# Altium PCB 载板V2.PcbDoc (part 1 of 2)
Units mil, origin at the board's own origin, x right, y up, seen from the top; angles counter-clockwise.
Board outline 2583.5 x 2223.97 mil, 4 copper layers (Top Layer, Mid-Layer 1, Mid-Layer 2, Bottom Layer); 78 components, 78 nets, 323 pads, 130 vias.
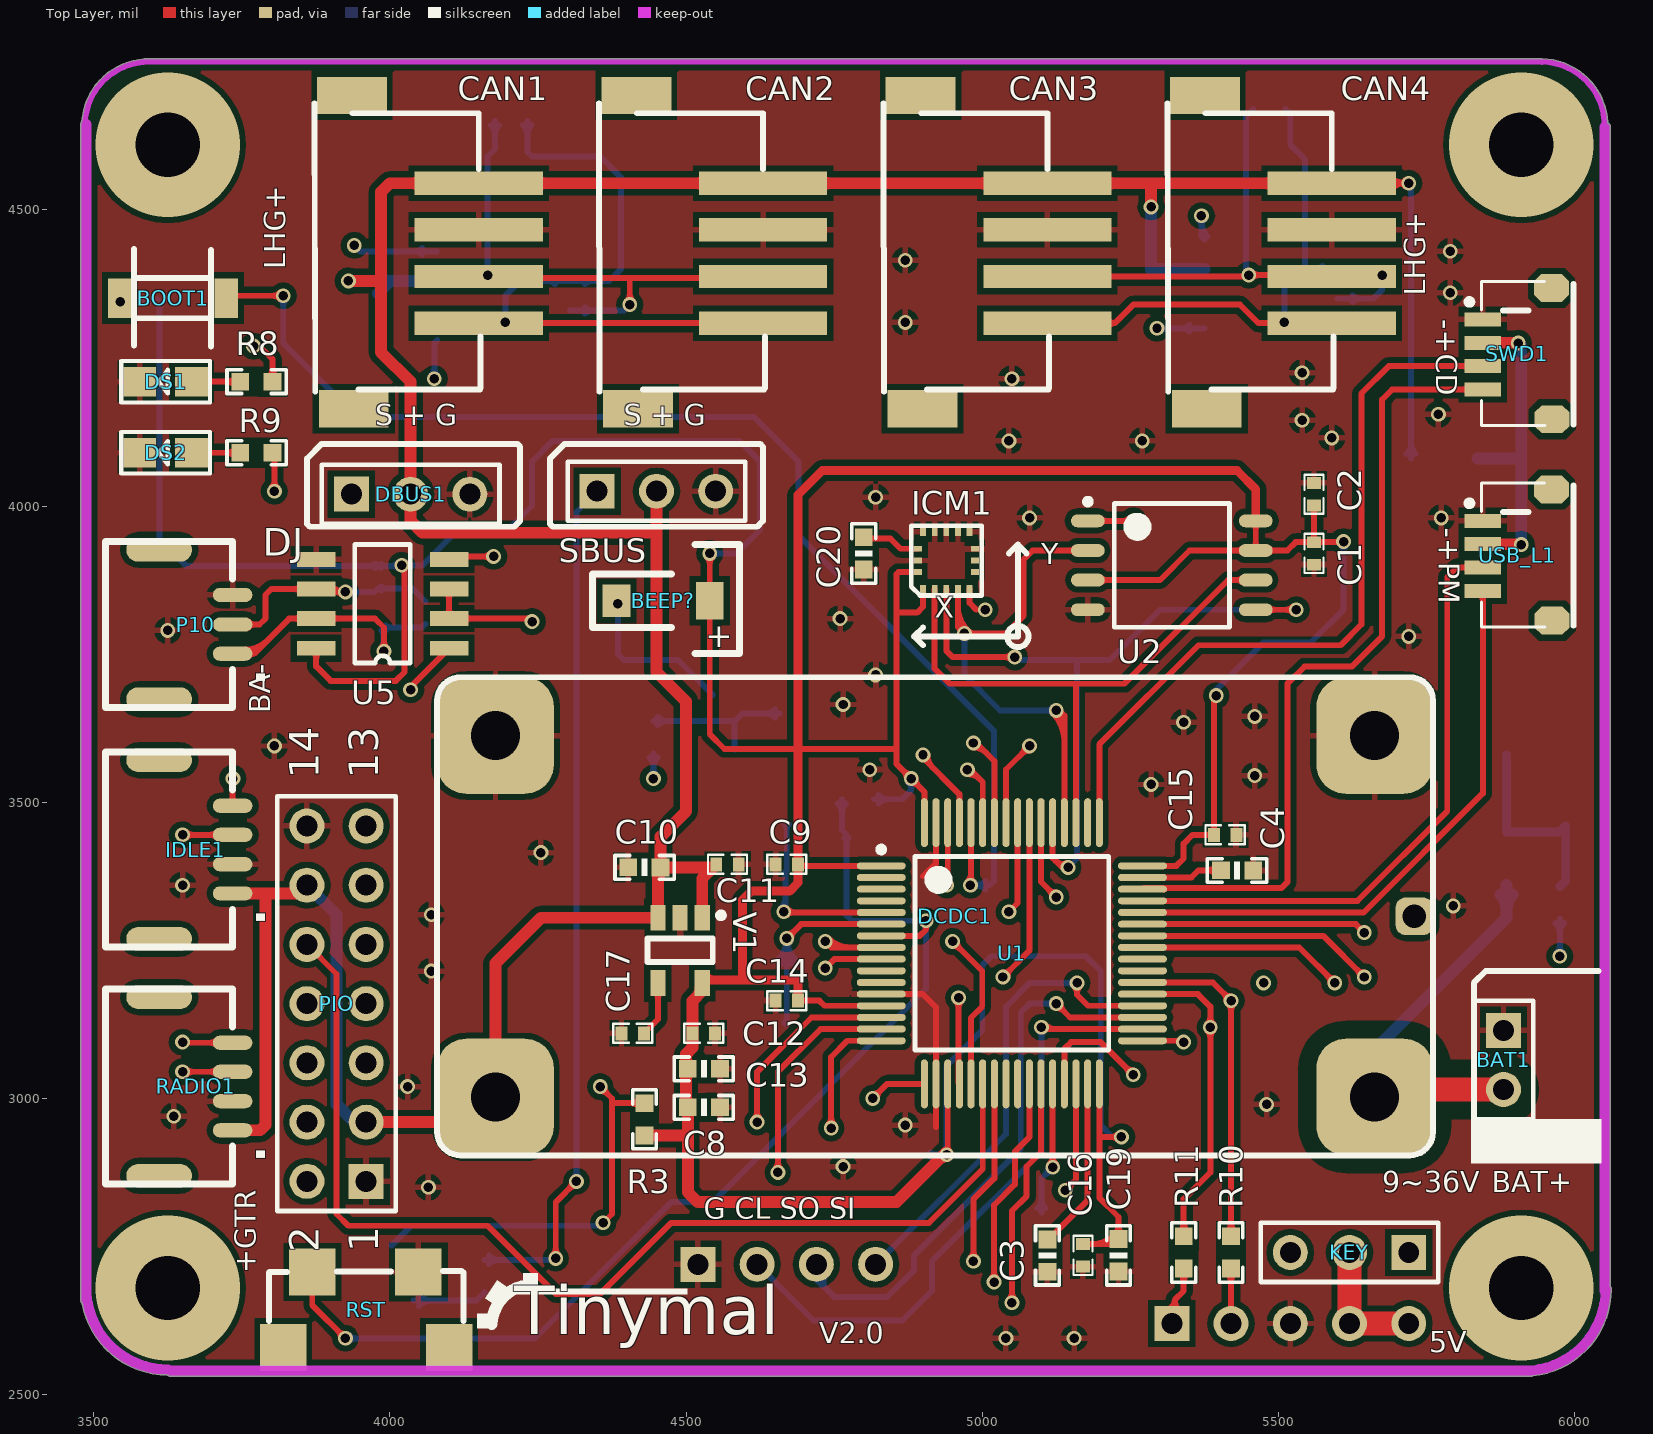
[diagram p0: Top Layer view]
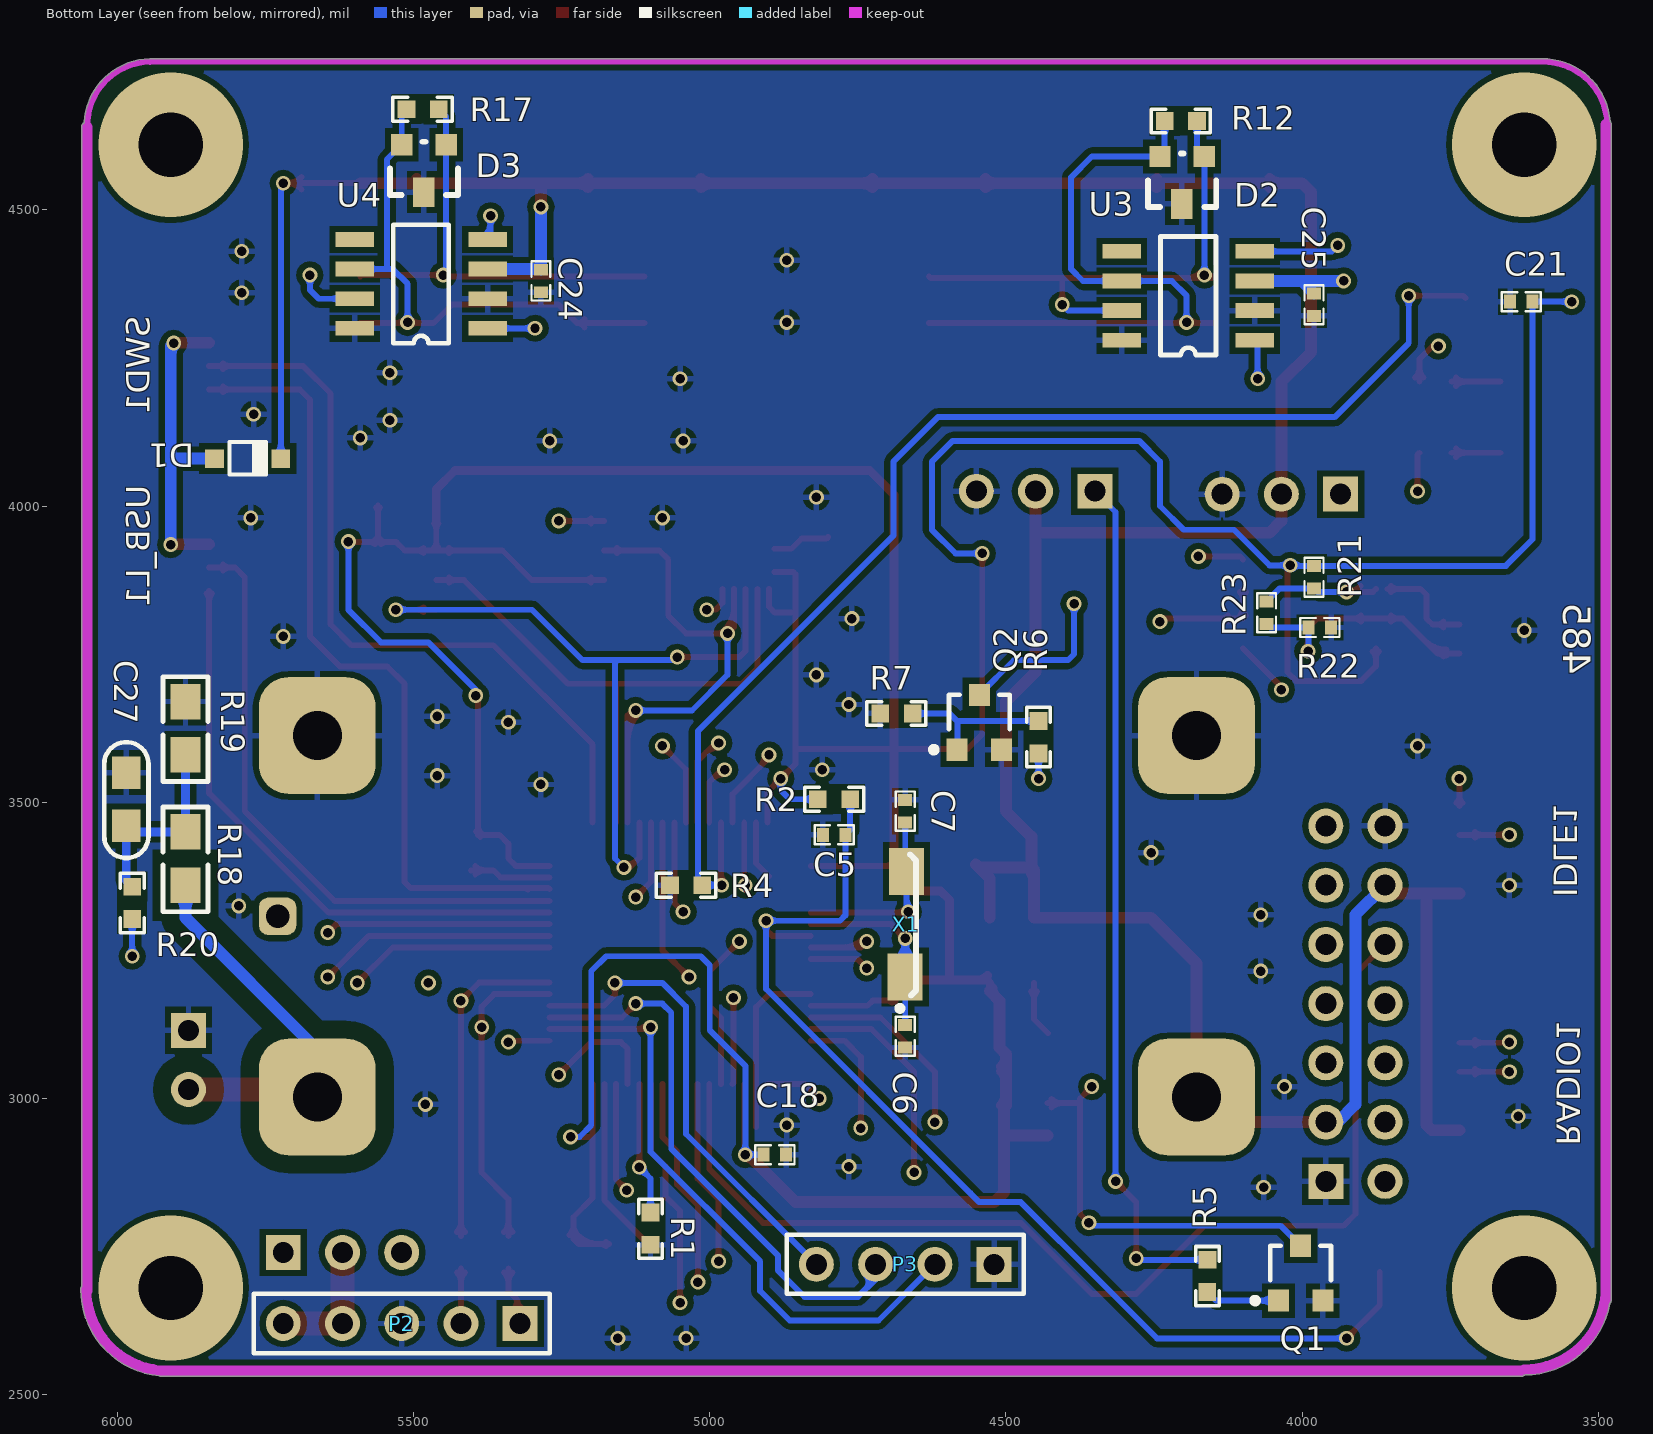
[diagram p1: Bottom Layer view, seen from below]
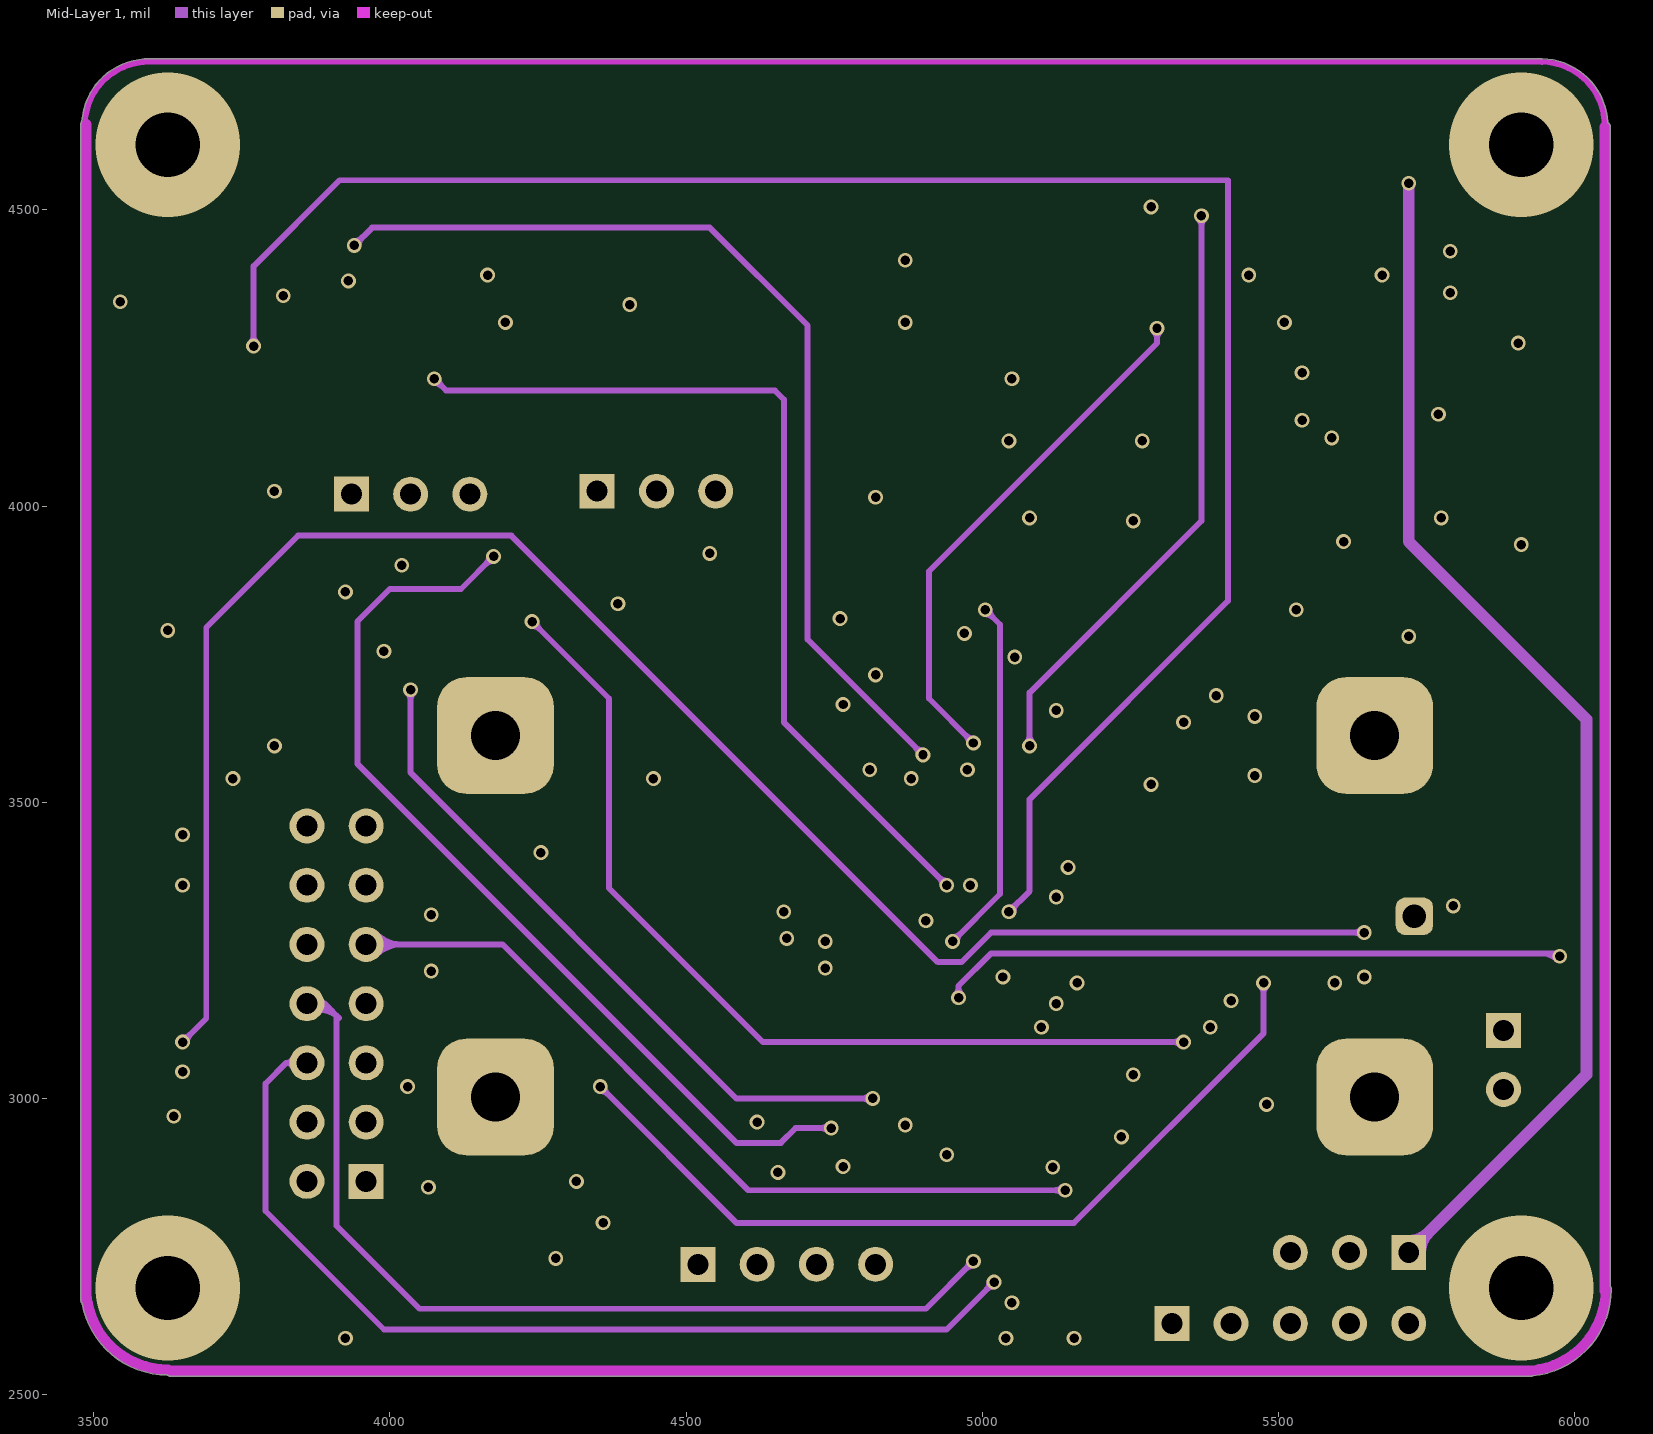
[diagram p2: Mid-Layer 1]
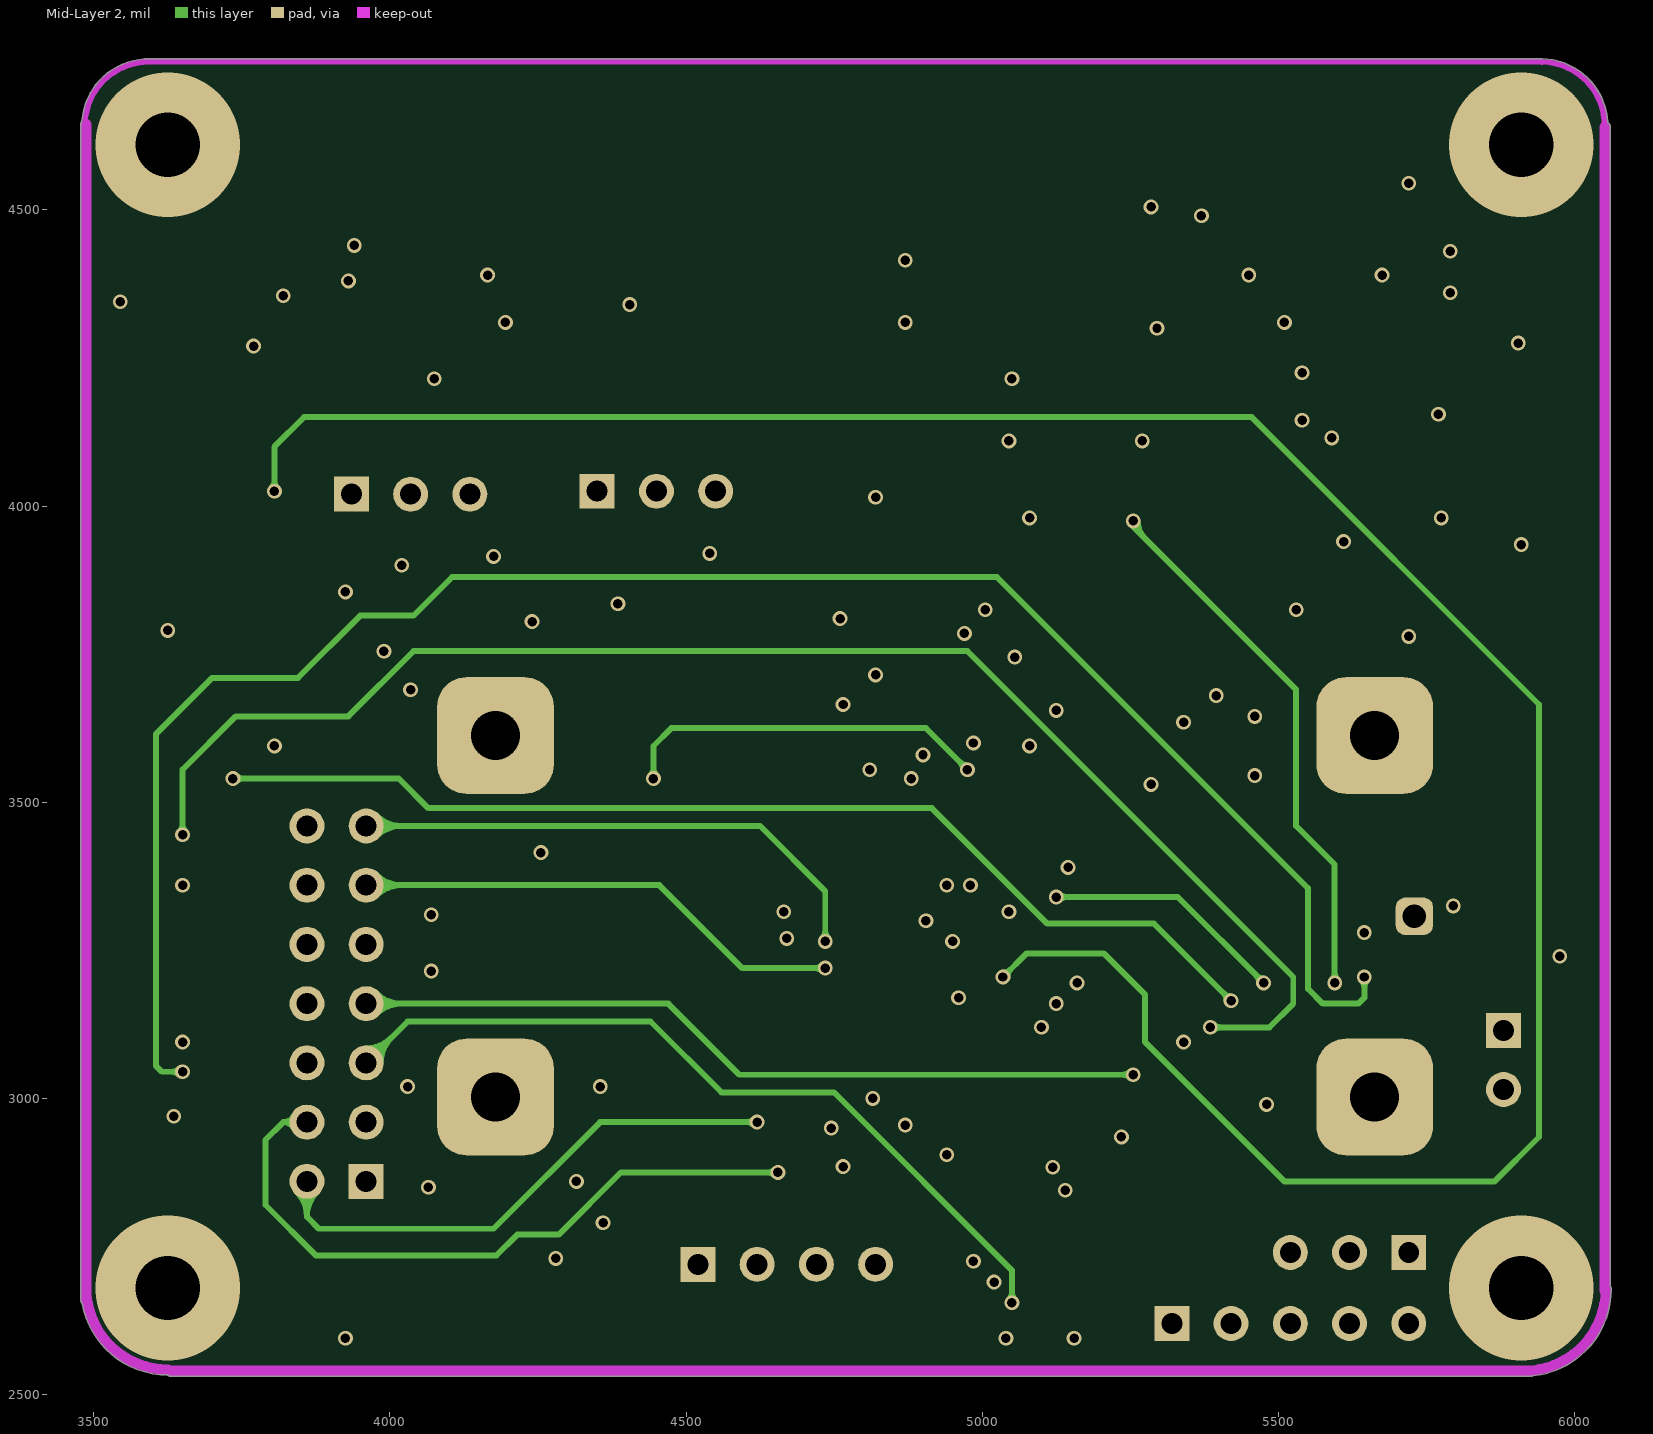
[diagram p3: Mid-Layer 2]
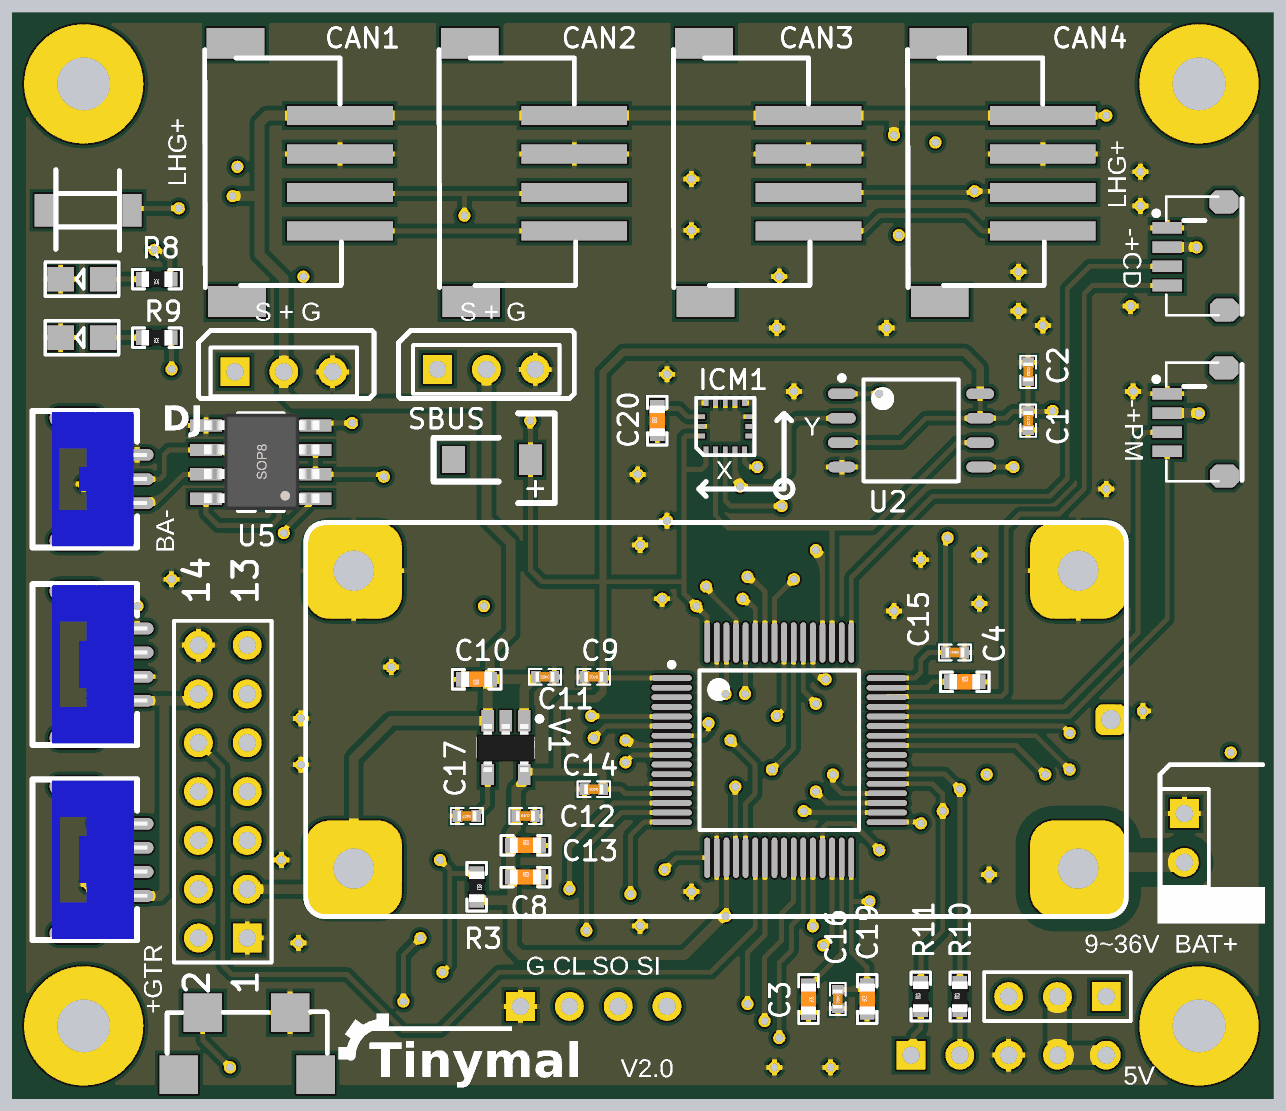
[diagram p5: 3D render of the assembled board from above, using the file's embedded part models]
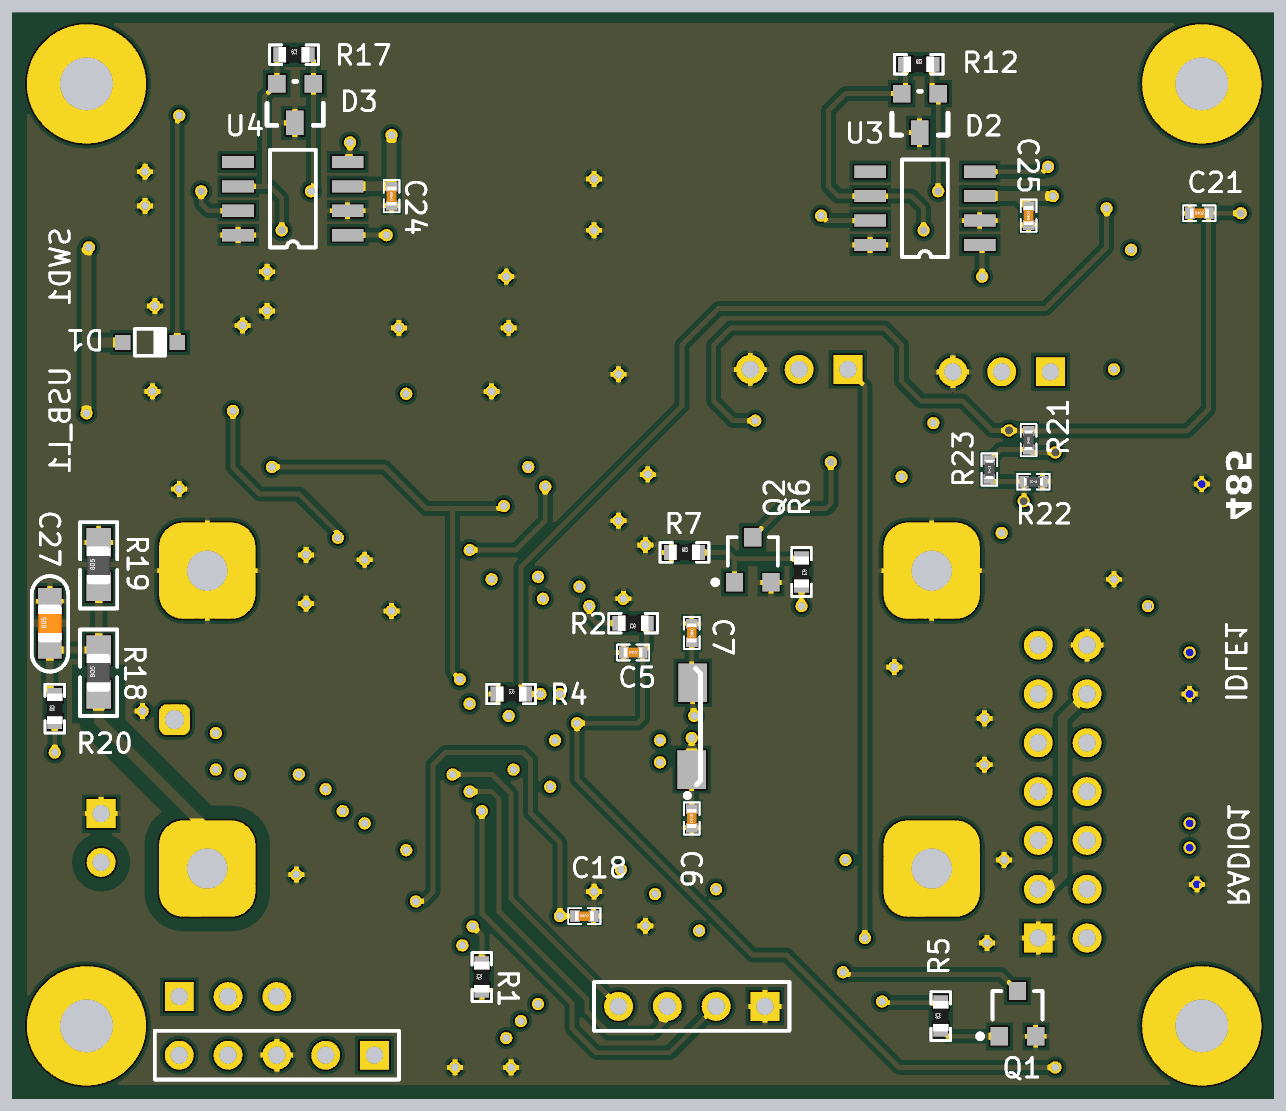
[diagram p6: 3D render of the assembled board from below, using the file's embedded part models]

## Layer stack, top to bottom
Top Layer: signal copper 1.4
Dielectric: dielectric 12.6, FR-4, Dk 4.8
Mid-Layer 1: signal copper 1.4
Dielectric: dielectric 12.6, FR-4, Dk 4.8
Mid-Layer 2: signal copper 1.4
Dielectric: dielectric 12.6, FR-4, Dk 4.8
Bottom Layer: signal copper 1.4

## Board outline
3478.25,2660 3478.25,4644.04 cw(c3487.2,4644.04) 3480.14,4649.54 cw(c3592.94,4641.98) 3595.05,4755.02 cw(c3592.94,4641.98) 3595.1,4755.01 3595.05,4755.02 5944.13,4754.94 cw(c5945,4750) 5945.1,4755.01 cw(c5942.94,4641.98) 6055.86,4647.61 cw(c6051.26,4639.92) 6060.21,4639.92 6060.21,2682.81 cw(c6052.8,2677.8) 6061.75,2677.8 cw(c5915,2677.8) 5929.5,2531.77 cw(c5925.98,2540) 5925.98,2531.05 3630,2531.05 cw(c3630,2540) 3624.11,2533.26 cw(c3625,2680) 3480.58,2653.98 cw(c3487.2,2660)

## Design rules (kind name [scope] priority, off if disabled: settings)
Clearance Clearance_3 [(InPolygon) vs InNet('VCC_DJ')] p1: gap=30
Clearance Clearance_2 [(InPolygon) vs InNet('POWER')] p2: gap=30
Clearance Clearance_1 [(InPolygon)] p3: gap=10
Clearance [All] p4: gap=6
PolygonConnect [All] p1: connectstyle=Relief reliefconductorwidth=10 reliefentries=4 polygonreliefangle="90 Angle"
RoutingVias [All] p1: holewidth=28 width=50 viastyle="Through Hole" minholewidth=16 minwidth=25 maxholewidth=28 maxwidth=50
SilkscreenOverComponentPads [All] p1: minsilkscreentomaskgap=10
SolderMaskExpansion [All] p1: expansion=4
Width [All] p1: maxlimit=66 minlimit=10 preferedwidth=10 minimp=50.000000 maximp=50.000000 favimp=50.000000
27 further rules are at their usual default settings.

## Components (designator, comment, footprint, x,y, rotation, side; value= is the part's Value field where it differs from the comment)
BAT1 "Header 2" HDR1X2 5880,3115 r270 top
BEEP? "BEEP" DET402 4540,3840 r180 top
BOOT1 "Header 2" 663*4*2.0/2.5mm 3670,4335 r180 top
C1 "0.1UF" "C 0402" 5560,3920 r270 top
C2 "1UF" "C 0402" 5560,4020 r270 top
C3 "2.2UF" C0603 5110,2735 r270 top
C4 "2.2UF" C0603 5430,3385 r0 top
C5 "10NF" "C 0402" 4790,3445 r180 bottom
C6 "20PF" "C 0402" 4670,3105 r90 bottom
C7 "20PF" "C 0402" 4670,3485 r270 bottom
C8 "0.1UF" C0603 4530,2985 r0 top
C9 "0.1UF" "C 0402" 4670,3395.1 r180 top
C10 "10uF" C0603 4430,3390 r180 top
C11 "0.1uF" "C 0402" 4570,3395.1 r180 top
C12 "0.1uF" "C 0402" 4530,3110 r0 top
C13 "10uF" C0603 4530,3050 r0 top
C14 "0.1UF" "C 0402" 4670,3165 r180 top
C15 "0.1UF" "C 0402" 5410,3445 r0 top
C16 "0.1UF" "C 0402" 5170,2735 r270 top
C17 "0.1uF" "C 0402" 4410,3110 r180 top
C18 "0.1UF" "C 0402" 4890,2905 r180 bottom
C19 "0.1UF" C0603 5230,2735 r90 top
C20 "0.1UF" C0603 4800,3920 r90 top
C21 "0.1UF" "C 0402" 3630,4345 r180 bottom
C24 "0.1UF" "C 0402" 5285,4380 r90 bottom
C25 "0.1UF" "C 0402" 3980,4340 r90 bottom
C27 "100uF" C0805 5985,3505 r90 bottom
CAN1 "Header 4" PH2.0-4SMT 4150,4545 r270 top
CAN2 "Header 4" PH2.0-4SMT 4630,4545 r270 top
CAN3 "Header 4" PH2.0-4SMT 5110,4545 r270 top
CAN4 "Header 4" PH2.0-4SMT 5590,4545 r270 top
D1 "BAT54WS" SOD-323 5780,4080 r0 bottom
D2 "PESD1CAN" SOT-23 4165,4590 r0 bottom
D3 "PESD1CAN" SOT-23 5445,4610 r0 bottom
DBUS1 "Header 3" HDR1X3 3935,4020 r0 top
DCDC1 "Header 2X2" DCDC5V 5660,3000 r180 top
DS1 "LED1" SMDLED 3665.03,4209.94 r180 top
DS2 "LED1" SMDLED 3665.03,4089.94 r180 top
ICM1 "ICM20602" ICM20602 4900,3860 r90 top
IDLE1 "Header 4" JST_GH_V4 3520,3420 r90 top
KEY "MSK-12D19" HDR1X3 5720,2740 r180 top
P2 "Header 5" HDR1X5 5320,2620 r0 bottom
P3 "Header 4" HDR1X4 4520,2720 r0 bottom
P10 "Header 3" JST_GH_V3 3520,3800 r90 top
PIO "Header 7X2" HDR2X7 3960,2860 r90 top
Q1 "S8050" SOT-23R 4002.5,2700 r180 bottom
Q2 "S8050" SOT-23R 4545,3630 r180 bottom
R1 "10K" R0603 5100,2780 r90 bottom
R2 "10K" R0603 4790,3505 r0 bottom
R3 "10K" R0603 4430,2965 r270 top
R4 "10K" R0603 5040,3360 r180 bottom
R5 "560R" R0603 4160,2700 r90 bottom
R6 "1K" R0603 4445.06,3610 r270 bottom
R7 "10K" R0603 4685,3650 r180 bottom
R8 "100R" R0603 3775.03,4209.94 r180 top
R9 "100R" R0603 3775.03,4089.94 r180 top
R10 "10K" R0603 5420,2740 r90 top
R11 "10K" R0603 5340,2740 r90 top
R12 "120R" R0603 4205,4650 r180 bottom
R17 "120R" R0603 5485,4670 r180 bottom
R18 "100K" R0805 5885,3405 r90 bottom
R19 "10K" R0805 5885,3625 r90 bottom
R20 "560R" R0603 5975,3330 r90 bottom
R21 "360R" "R 0402" 3980,3880 r90 bottom
R22 "360R" "R 0402" 3970,3795 r0 bottom
R23 "120R" "R 0402" 4060,3820 r90 bottom
RADIO1 "Header 4" JST_GH_V4 3520,3020 r90 top
RST "Header 2" KEY_SAD 3820,2580 r0 top
SBUS "Header 3" HDR1X3 4350,4025 r0 top
SWD1 "Header 4" "SH1.0-4P - UP" 5845,4315 r270 top
U1 "STM32F405RGT6" LQFP64_M 5050,3245 r0 top locked
U2 "W25X16" W25Q32FVZPIG 5320,3900 r0 top
U3 "TJA1050" SOP-8 4080,4280 r0 bottom
U4 "TJA1050" SOP-8 5375,4300 r0 bottom
U5 "SP3485" SOP-8 4100,3760 r180 top
USB_L1 "Header 4" "SH1.0-4P - UP" 5845,3975 r270 top
V1 "RT9193-3.3/LP2985/SPX3819" SOT23-5 4490,3250 r90 top
X1 "8MHZ" PXCL 4670,3205 r180 bottom

## Footprints (in the part's own frame and the unit in brackets; to place one, negate y for a bottom-side part, rotate by r counter-clockwise, add the part's x,y. Pads: shape width x height; smd on the part's side, far side on the other; paste and mask are expansions set on the pad)
663*4*2.0/2.5mm [mil] "小龟按键"
  rect 39.37x66.93 smd: 1(126,-16) 2(-54,-16)
  silkscreen extent -28,-99 102,66
C0603 [mil]
  rect 30x30 smd: 1(-27,0) 2(27.5,-0.06)
  silkscreen extent -50,-20 50,20, body extent -31,-16 31,16, height 12
C0805 [mil]
  rect 55x48 smd: 1(-45,0) 2(45,0)
  silkscreen extent -99,-38 97,37, body extent -40,-25 39,25, height 31
"C 0402" [mil]
  rect 20x23.62 smd: 1(-19,0) 2(19,0)
  silkscreen extent -33,-16 33,16, body extent -20,-10 20,10, height 20
DCDC5V [mm]
  rrect50% 5x5 hole 2.1: 1(-0.065,-0.059) 2(37.635,-0.059) 3(-0.065,-15.559) 4(37.635,-15.559)
  rrect50% 1.6x1.6 hole 1: 2(-1.765,-7.809)
  silkscreen extent -2.57,-18.06 40.13,2.44
DET402 [mm]
  rect 1.2x1.6 smd: 1(0,-0.002)
  rect 1.2x1.4 smd: 2(4,0)
  silkscreen extent -1.27,-2.41 5.03,2.26
HDR1X2 [mm] "Connector; Header; 2 Position"
  rect 1.5x1.5 hole 0.9: 1(0,0)
  round 1.5 hole 0.9: 2(2.54,0)
  silkscreen extent -1.27,-1.27 3.81,1.27
HDR1X3 [mm] "Connector; Header; 3 Position"
  rect 1.5x1.5 hole 0.9: 1(0,0)
  round 1.5 hole 0.9: 2(2.54,0) 3(5.08,0)
  silkscreen extent -1.27,-1.27 6.35,1.27
HDR1X4 [mm] "Connector; Header; 4 Position"
  rect 1.5x1.5 hole 0.9: 1(0,0)
  round 1.5 hole 0.9: 2(2.54,0) 3(5.08,0) 4(7.62,0)
  silkscreen extent -1.27,-1.27 8.89,1.27
HDR1X5 [mm] "Connector; Header; 5 Position"
  rect 1.5x1.5 hole 0.9: 1(0,0)
  round 1.5 hole 0.9: 2(2.54,0) 3(5.08,0) 4(7.62,0) 5(10.16,0)
  silkscreen extent -1.27,-1.27 11.43,1.27
HDR2X7 [mm] "Connector; Header; 7x2 Position"
  rect 1.5x1.5 hole 0.9: 1(0,0)
  round 1.5 hole 0.9: 2(0,2.54) 3(2.54,0) 4(2.54,2.54) 5(5.08,0) 6(5.08,2.54) 7(7.62,0) 8(7.62,2.54) 9(10.16,0) 10(10.16,2.54) 11(12.7,0) 12(12.7,2.54) 13(15.24,0) 14(15.24,2.54)
  silkscreen extent -1.27,-1.27 16.51,3.81
ICM20602 [mm]
  rect 0.35x0.25 smd: 1(0,0) 2(0,-0.5) 3(0,-1) 4(0,-1.5) 5(0,-2) 9(2.45,-2) 10(2.45,-1.5) 11(2.45,-1) 12(2.45,-0.5) 13(2.45,0)
  rect 0.25x0.35 smd: 6(0.725,-2.225) 7(1.225,-2.225) 8(1.725,-2.225) 14(1.725,0.225) 15(1.225,0.225) 16(0.725,0.225)
  silkscreen extent -0.28,-2.51 2.72,0.51, body extent -0.38,-2.62 2.82,0.61, height 0.75
JST_GH_V3 [mil]
  rrect100% 24x67 smd: 1(-49.21,-214.57) 2(0,-214.57) 3(50,-214.57)
  rrect100% 40x111 smd: GND(-125.98,-90.55) GND(126,-90.55)
  silkscreen extent -140,-215 140,0, body extent -138,-235 138,-40, height 165
JST_GH_V4 [mil]
  rrect100% 24x67 smd: 1(-73.82,-214.57) 2(-24.61,-214.57) 3(25,-214.57) 4(74,-214.57)
  rrect100% 40x111 smd: GND(-150.59,-90.55) GND(151,-90.55)
  silkscreen extent -164,-215 165,0, body extent -162,-235 163,-40, height 165
KEY_SAD [mm]
  rect 2x2 smd: 1(1.245,3.226) 2(5.791,3.226) ""(0,0) ""(7.112,0)
  silkscreen extent -0.61,1.12 7.72,3.28
LQFP64_M [mm] "Thin QFP, 64-Leads, Body 10x10mm, Pitch 0.5mm, IPC Low Density"
  oval 2.1x0.3 smd: 1(-5.6,3.75) 2(-5.6,3.25) 3(-5.6,2.75) 4(-5.6,2.25) 5(-5.6,1.75) 6(-5.6,1.25) 7(-5.6,0.75) 8(-5.6,0.25) 9(-5.6,-0.25) 10(-5.6,-0.75) 11(-5.6,-1.25) 12(-5.6,-1.75) 13(-5.6,-2.25) 14(-5.6,-2.75) 15(-5.6,-3.25) 16(-5.6,-3.75) 33(5.6,-3.75) 34(5.6,-3.25) 35(5.6,-2.75) 36(5.6,-2.25) 37(5.6,-1.75) 38(5.6,-1.25) 39(5.6,-0.75) 40(5.6,-0.25) 41(5.6,0.25) 42(5.6,0.75) 43(5.6,1.25) 44(5.6,1.75) 45(5.6,2.25) 46(5.6,2.75) 47(5.6,3.25) 48(5.6,3.75)
  oval 0.3x2.1 smd: 17(-3.75,-5.6) 18(-3.25,-5.6) 19(-2.75,-5.6) 20(-2.25,-5.6) 21(-1.75,-5.6) 22(-1.25,-5.6) 23(-0.75,-5.6) 24(-0.25,-5.6) 25(0.25,-5.6) 26(0.75,-5.6) 27(1.25,-5.6) 28(1.75,-5.6) 29(2.25,-5.6) 30(2.75,-5.6) 31(3.25,-5.6) 32(3.75,-5.6) 49(3.75,5.6) 50(3.25,5.6) 51(2.75,5.6) 52(2.25,5.6) 53(1.75,5.6) 54(1.25,5.6) 55(0.75,5.6) 56(0.25,5.6) 57(-0.25,5.6) 58(-0.75,5.6) 59(-1.25,5.6) 60(-1.75,5.6) 61(-2.25,5.6) 62(-2.75,5.6) 63(-3.25,5.6) 64(-3.75,5.6)
  silkscreen extent -5.72,-4.15 4.15,4.57, body extent -5,-5 5,5, height 1.6
PH2.0-4SMT [mm]
  rect 1x5.5 smd: 1(0,0) 2(2,0) 3(4,0) 4(6,0)
  rect 1.6x3 smd: ""(-3.759,-5.436) ""(9.677,-5.359)
  silkscreen extent -3.43,-7.04 8.94,0.08
PXCL [mm]
  rect 1.5x2 smd: 1(0,0) 2(0.051,4.521)
  silkscreen extent -0.34,-1.45 0.46,5.26
R0603 [mil]
  rect 30x30 smd: 1(-27,0) 2(27.5,-0.06)
  silkscreen extent -50,-20 50,20, body extent -31,-16 31,16, height 12
R0805 [mil]
  rect 60x50 smd: 1(45,0) 2(-45,0)
  silkscreen extent -90,-38 87,38, body extent -41,-24 38,25, height 31
"R 0402" [mil]
  rect 20x23.62 smd: 1(-19,0) 2(19,0)
  silkscreen extent -33,-16 33,16, body extent -20,-10 20,10, height 12
"SH1.0-4P - UP" [mm]
  rect 0.6x1.55 smd: 1(0,0) 2(1,0) 3(2,0) 4(3,0)
  oct 1.2x1.5 smd: 1.(4.279,2.972) A(-1.346,2.946)
  silkscreen extent -1.63,-0.7 4.55,3.89
SMDLED [mm]
  rect 1.4x1.27 smd: 1(0.001,-0.002) 2(2.211,-0.002)
  silkscreen extent -0.8,-0.89 3.01,0.89
SOD-323 [mm]
  rect 0.8x0.8 smd: 1(1.422,0) 2(-1.422,0)
  silkscreen extent -0.79,-0.74 0.79,0.69
SOP-8 [mil]
  rect 65x25 smd: 1(0,0) 2(0,-50) 3(0,-100) 4(0,-150) 5(224.41,-150) 6(224.41,-100) 7(224.41,-50) 8(224.41,0)
  silkscreen extent 65,-175 159,25
SOT23-5 [mm]
  rect 1.1x0.65 smd: 1(1.4,-0.95) 2(1.4,0) 3(1.4,0.95) 4(-1.4,0.95) 5(-1.4,-0.95)
  silkscreen extent -0.5,-1.88 1.62,1.4, body extent -1.28,-1.5 1.22,1.5, height 1.05
SOT-23 [mil]
  rect 36x36 smd: 1(0,0) 2(75,0)
  rect 36x50 smd: 3(38,80)
  silkscreen extent -20,-5 95,85
SOT-23R [mm]
  rect 0.9x0.95 smd: 1(0.95,-1.048) 2(-0.95,-1.048) 3(0,1.302)
  silkscreen extent -2.07,-1.17 1.3,1.3
W25Q32FVZPIG [mm] "SOP, 8-Leads, Body 5.3x5.3mm (max), Pitch 1.27mm, IPC Medium Density"
  oval 1.45x0.55 smd: 1(-3.6,1.905) 2(-3.6,0.635) 3(-3.6,-0.635) 4(-3.6,-1.905) 5(3.6,-1.905) 6(3.6,-0.635) 7(3.6,0.635) 8(3.6,1.905)
  silkscreen extent -3.72,-2.65 2.47,2.85, body extent -2.64,-2.64 2.64,2.64, height 2.65

## Part data
BAT1 BOOT1 RST: "Header, 2-Pin"
C1 C2 C5 C8 C9 C10 C12 C13 C14 C15 C16 C18 C19 C20 C24 C25 C27: library part CAP, "Capacitor"
C3 C4: library part CAP1, "胆电容"
C6 C7: library part C2, "0805"
C11 C17 C21: library part Capacitor, "普通电容"
CAN1 CAN2 CAN3 CAN4 IDLE1 P3 RADIO1 SWD1 USB_L1: "Header, 4-Pin"
D1: library part BAT54, "单肖特基二极管"
DBUS1 P10 SBUS: "Header, 3-Pin"
DCDC1: "Header, 2-Pin, Dual row"
DS1 DS2: library part LED2, "Typical RED, GREEN, YELLOW, AMBER GaAs LED"
KEY: library part "Header 3", "Header, 3-Pin"
P2: "Header, 5-Pin"
PIO: "Header, 7-Pin, Dual row"
Q1 Q2: library part NPN, "8050/BCW846/BCW847"
R1 R2 R3 R4 R5 R6 R7 R8 R9 R10 R11 R12 R17 R18 R19 R20 R21 R22 R23: library part Res2, "0603"
U2: "W25X16;SST25VF016;MX25L1605"
U3 U4: library part SN65HVD230D
U5: library part MAX3485
V1: "降压IC"
X1: library part XTAL, "Crystal Oscillator"

## Via types
v1: diameter 25, hole 16, Top Layer to Bottom Layer, 124 vias
v2: diameter 244.09, hole 108.27, Top Layer to Bottom Layer, 6 vias

## Nets (pads, with @x,y where several pads share a name; then routed paths per layer and width w, separated by ;. In a path a pad name is that pad's centre, name@x,y a point inside that pad or via, vN(x,y) a via of type N, cw(c..) or ccw(c..) an arc to the next point about the centre after c; other vN are vias at no path point)
3.3V: BEEP?.1 BOOT1.1 C1.1 C2.2 C8.1 C9.1 C12.1 C13.1 C14.1 C15.1 C16.1 C18.1 C19.2 C21.2 ICM1.1 ICM1.16 R2.2 R3.2 R21.2 U1.1 U1.13 U1.19 U1.32 U1.48 U1.64 U2.3 U2.7 U2.8 U5.8 V1.5 | length 10495.8
  Top Layer w10: U5.8@3870.29,3754.7 cw(c3857.48,3741.89) 3875.59,3741.89 cw(c3893.7,3741.89) U5.8@3880.89,3754.7 ; U5.8@3875.59,3760 3875.59,3729.41 3900,3705 4010,3705 4025,3720 4025,3895 v1(4020,3900) ; v1@4534.7,3914.7 cw(c4521.89,3901.89) 4540,3901.89 cw(c4558.11,3901.89) v1@4545.3,3914.7 ; v1(4540,3920) BEEP?.1@4540,3840.06 4540,3615 4565,3590 4689,3590 4855,3590 ; C14.1@4689,3165 4725,3165 4733.58,3156.42 U1.13@4829.53,3156.42 ; C9.1@4689,3395.1 4691.46,3392.64 U1.1@4829.53,3392.64 4740,3392.64 ; C14.1@4692.54,3161.46 cw(c4701.07,3152.93) 4701.07,3165 cw(c4701.07,3177.07) C14.1@4692.54,3168.54 ; C9.1@4692.54,3389.75 cw(c4699.51,3382.77) 4699.51,3392.64 ; C9.1@4692.54,3396.82 ccw(c4702.63,3406.92) 4702.63,3392.64 ; v1@4872.5,3540 ccw(c4854.39,3540) 4867.2,3552.8 ccw(c4880,3565.61) v1@4880,3547.5 ; v1@4880,3532.5 cw(c4880,3514.39) 4892.8,3527.2 cw(c4905.61,3540) v1@4887.5,3540 ; ICM1.16@4891.14,3888.54 4858.54,3888.54 4855,3885 4855,3820 ; ICM1.1@4900,3860 4900,3830 4890,3820 4855,3820 ; U1.64@4902.36,3465.47 4902.36,3517.64 v1(4880,3540) 4855,3565 4855,3590 ; v1(4940,2905) 4940,2910 4941.73,2911.73 U1.19@4941.73,3024.53 ; C16.1@5170,2754 5221.56,2754 C19.2@5230.06,2762.5 ; C16.1@5175.35,2750.46 cw(c5183.88,2741.93) 5183.88,2754 cw(c5183.88,2766.07) C16.1@5175.35,2757.54 ; U2.3@5178.27,3875 5300,3875 5350,3925 U2.7@5461.73,3925 ; 5185.4,2754 ccw(c5185.4,2807.16) 5222.99,2769.57 ccw(c5205.92,2786.64) 5230.06,2786.64 ccw(c5254.21,2786.64) C19.2@5237.14,2769.57 ; U1.32@5197.64,3024.53 5197.64,2935 ; U2.3@5200.1,3870.88 cw(c5210.05,3860.93) 5210.05,3875 cw(c5210.05,3889.07) U2.3@5200.1,3879.12 ; 5209.54,2754 ccw(c5209.54,2783.02) C19.2@5230.06,2762.5 ; v1@5229.7,2929.7 ccw(c5216.89,2916.89) 5216.89,2935 ccw(c5216.89,2953.11) v1@5229.7,2940.3 ; v1(5235,2935) 5197.64,2935 ; U1.48@5270.47,3392.64 5327.64,3392.64 5340,3405 5340,3430 5355,3445 C15.1@5391,3445 5391,3684 v1(5395,3680) ; C15.1@5387.46,3441.46 ccw(c5378.93,3432.93) 5378.93,3445 ccw(c5378.93,3457.07) C15.1@5387.46,3448.54 ; C15.1@5387.46,3450.35 ccw(c5378.93,3458.88) 5391,3458.88 ccw(c5403.07,3458.88) C15.1@5394.54,3450.35 ; U2.7@5439.9,3920.88 ccw(c5429.95,3910.93) 5429.95,3925 ccw(c5429.95,3939.07) U2.7@5439.9,3929.12 ; U2.7@5457.61,3929.12 ccw(c5447.67,3939.07) 5461.73,3939.07 ccw(c5475.8,3939.07) U2.7@5465.85,3929.12 ; U2.8@5457.61,3970.88 cw(c5447.67,3960.93) 5461.73,3960.93 cw(c5475.8,3960.93) U2.8@5465.85,3970.88 ; U2.8@5461.73,3975 U2.7@5461.73,3925 ; U2.7@5483.57,3920.88 cw(c5493.52,3910.93) 5493.52,3925 cw(c5493.52,3939.07) U2.7@5483.57,3929.12 ; C1.1@5554.65,3935.46 ccw(c5546.12,3926.93) 5546.12,3939 ccw(c5546.12,3951.07) C1.1@5554.65,3942.54 ; C1.1@5556.46,3942.54 ccw(c5547.93,3951.07) 5560,3951.07 ccw(c5572.07,3951.07) C1.1@5563.54,3942.54 ; C2.2@5556.46,3997.46 cw(c5547.93,3988.93) 5560,3988.93 cw(c5572.07,3988.93) C2.2@5563.54,3997.46 ; C2.2@5560,4001 C1.1@5560,3939 ; C1.1@5565.35,3935.46 cw(c5573.88,3926.93) 5573.88,3939 cw(c5573.88,3951.07) C1.1@5565.35,3942.54 ; v1(5610,3940) 5609,3939 C1.1@5560,3939 ; 4855,3590 4855,3820 ; 5197.64,2935 5197.64,2832.36 5230.06,2799.94 C19.2@5230.06,2762.5 ; U2.7@5461.73,3925 5515,3925 5529,3939 C1.1@5560,3939
  Top Layer w15: V1.5@4527.4,3194.88 4532.52,3200 4595,3200 ; V1.5@4531.15,3207.48 ccw(c4549.21,3225.55) 4549.21,3200 ; C14.1@4689,3165 4689,3196 4685,3200 4595,3200 ; U2.8@5461.73,3975 5461.73,4028.27 5430,4060 4730,4060 4689,4019 4689,3590 C9.1@4689,3395.1 4689,3364 4675,3350 4610,3350 4595,3335 4595,3200
  Top Layer w20: R3.2@4429.94,2937.5 4503,2937.5 ; 4500,3004.31 ccw(c4522.31,3004.31) C8.1@4506.54,2988.54 ; 4500,3030.69 cw(c4522.31,3030.69) C13.1@4506.54,3046.46 ; 4500,3069.31 ccw(c4522.31,3069.31) C13.1@4506.54,3053.54 ; V1.5@4519.36,3173.36 ccw(c4506.7,3186.02) V1.5@4524.61,3186.02 ; V1.5@4527.4,3181.4 4511,3165 C12.1@4511,3110 4511,3086 4500,3075 4500,2988 C8.1@4503,2985 4503,2937.5 ; 4927.2,2897.2 cw(c4940,2884.39) v1@4940,2902.5 ; v1@4940,2910 4855,2825 4520,2825 4503,2842 4503,2937.5
  Bottom Layer w10: v1(3545,4345) C21.2@3611,4345 3611,3944 3656,3899 R21.2@3980,3899 4019,3899 v1(4020,3900) 4055,3900 4115,3960 4200,3960 4240,4000 4240,4075 4275,4110 4590,4110 4625,4075 4625,3960 4585,3920 v1(4540,3920) ; v1@3550.3,4339.7 cw(c3563.11,4326.89) 3563.11,4345 cw(c3563.11,4363.11) v1@3550.3,4350.3 ; C21.2@3607.46,4339.65 cw(c3598.93,4331.12) 3611,4331.12 cw(c3623.07,4331.12) C21.2@3614.54,4339.65 ; C21.2@3607.46,4341.46 ccw(c3598.93,4332.93) 3598.93,4345 ccw(c3598.93,4357.07) C21.2@3607.46,4348.54 ; R21.2@3974.65,3895.46 ccw(c3966.12,3886.93) 3966.12,3899 ccw(c3966.12,3911.07) R21.2@3974.65,3902.54 ; R21.2@3985.35,3895.46 cw(c3993.88,3886.93) 3993.88,3899 cw(c3993.88,3911.07) R21.2@3985.35,3902.54 ; 3999.48,3899 ccw(c3999.48,3920.52) v1@4014.7,3905.3 ; 4004.31,3899 cw(c4004.31,3884.31) v1@4014.7,3894.7 ; v1@4025.3,3894.7 cw(c4038.11,3881.89) 4038.11,3900 cw(c4038.11,3918.11) v1@4025.3,3905.3 ; v1@4545.3,3914.7 cw(c4558.11,3901.89) 4558.11,3920 cw(c4558.11,3938.11) v1@4545.3,3925.3 ; R2.2@4817.5,3505.06 4865.06,3505.06 4880,3520 v1(4880,3540) ; R2.2@4824.57,3497.99 cw(c4841.64,3480.92) 4841.64,3505.06 cw(c4841.64,3529.21) R2.2@4824.57,3512.14 ; v1@4874.7,3534.7 cw(c4861.89,3521.89) 4880,3521.89 cw(c4898.11,3521.89) v1@4885.3,3534.7 ; C18.1@4909,2905 v1(4940,2905) 4940,3055 5000,3115 5000,3225 5015,3240 5175,3240 5200,3215 5200,2955 5220,2935 v1(5235,2935) ; C18.1@4912.54,2901.46 cw(c4921.07,2892.93) 4921.07,2905 cw(c4921.07,2917.07) C18.1@4912.54,2908.54 ; v1@4934.7,2899.7 ccw(c4921.89,2886.89) 4921.89,2905 ccw(c4921.89,2923.11) 4934.7,2910.3 ccw(c4921.89,2923.11) 4940,2923.11 ccw(c4958.11,2923.11) v1@4945.3,2910.3 ; v1(5395,3680) 5395,3690 5475,3770 5555,3770 5610,3825 v1(5610,3940) v1@5610,3945 ; v1@5604.7,3934.7 cw(c5591.89,3921.89) 5610,3921.89 cw(c5628.11,3921.89) v1@5615.3,3934.7
5V: C10.1 C11.2 C24.2 C25.2 CAN1.1 CAN2.1 CAN3.1 CAN4.1 D1.2 DBUS1.2 DCDC1.2@4178.32,3002.34 IDLE1.1 KEY.1 PIO.3 PIO.12 RADIO1.1 SBUS.2 U3.3 U4.3 V1.1 V1.3 | length 8945.2
  Top Layer w10: CAN4.1@5590,4545 v1(5720,4545) ; CAN4.1@5688.97,4534.62 cw(c5714.04,4509.55) 5714.04,4545 cw(c5714.04,4580.45) CAN4.1@5688.97,4555.38 ; v1@5714.7,4539.7 ccw(c5701.89,4526.89) 5701.89,4545 ccw(c5701.89,4563.11) v1@5714.7,4550.3
  Top Layer w20: RADIO1.1@3734.57,2946.18 3781.18,2946.18 3790,2955 3790,3346.18 ; IDLE1.1@3734.57,3346.18 3790,3346.18 ; PIO.12@3860,3360 3846.18,3346.18 3790,3346.18 ; v1(3930,4380) 3975,4380 ; PIO.3@3960,2960 4135.98,2960 DCDC1.2@4178.32,3002.34 4178.32,3228.32 4255.12,3305.12 V1.3@4452.6,3305.12 4452.6,3385.6 C10.1@4457,3390 ; CAN1.1@4054.57,4538.15 ccw(c4038.04,4521.62) 4038.04,4545 ccw(c4038.04,4568.38) CAN1.1@4054.57,4551.85 ; CAN1.1@4245.43,4538.15 cw(c4261.96,4521.62) 4261.96,4545 cw(c4261.96,4568.38) CAN1.1@4245.43,4551.85 ; SBUS.2@4450,4025 4450,3955 ; 4452.6,3367.3 cw(c4479.7,3367.3) C10.1@4460.54,3386.46 ; V1.1@4527.4,3305.12 4527.4,3371.5 C11.2@4545.9,3390 ; CAN2.1@4534.57,4538.15 ccw(c4518.04,4521.62) 4518.04,4545 ccw(c4518.04,4568.38) CAN2.1@4534.57,4551.85 ; C11.2@4551,3395.1 C11.2@4545.9,3390 ; CAN2.1@4725.43,4538.15 cw(c4741.96,4521.62) 4741.96,4545 cw(c4741.96,4568.38) CAN2.1@4725.43,4551.85 ; CAN3.1@5014.57,4538.15 ccw(c4998.04,4521.62) 4998.04,4545 ccw(c4998.04,4568.38) CAN3.1@5014.57,4551.85 ; CAN3.1@5205.43,4538.15 cw(c5221.96,4521.62) 5221.96,4545 cw(c5221.96,4568.38) CAN3.1@5205.43,4551.85 ; v1(5285,4505) 5285,4540 ; CAN4.1@5494.57,4538.15 ccw(c5478.04,4521.62) 5478.04,4545 ccw(c5478.04,4568.38) CAN4.1@5494.57,4551.85 ; CAN4.1@5590,4545 CAN3.1@5110,4545 CAN2.1@4630,4545 CAN1.1@4150,4545 4000,4545 3985,4530 3985,4260 4035,4210 DBUS1.2@4035,4020 4035,3975 4055,3955 4450,3955 ; 4450,3955 4450,3940 4450,3720 4500,3670 4500,3485 4457,3442 C10.1@4457,3390 ; C10.1@4457,3390 C11.2@4545.9,3390
  Mid-Layer 1 w20: KEY.1@5720,2740 6020,3040 6020,3640 5720,3940 v1(5720,4545) ; KEY.1@5720,2759.53 ccw(c5720,2806.67) 5753.34,2773.34 ccw(c5786.67,2740) KEY.1@5739.53,2740
  Bottom Layer w10: D1.2@5716.4,4087.6 ccw(c5698.05,4105.95) 5724,4105.95 ccw(c5749.95,4105.95) D1.2@5731.6,4087.6 ; v1(5720,4545) 5724,4541 D1.2@5724,4080
  Bottom Layer w20: PIO.12@3860,3360 3910,3310 3910,2990 3940,2960 PIO.3@3960,2960 ; v1(3930,4380) 4001,4380 ; C25.2@3980,4359 4001,4380 ; U3.3@4080,4380 4001,4380 ; v1(5285,4505) C24.2@5285,4399 5286,4400 U4.3@5375,4400
BAT: R20.1 U1.20 | length 1422.7
  Top Layer w10: v1@4954.7,3164.7 cw(c4941.89,3151.89) 4960,3151.89 cw(c4978.11,3151.89) v1@4965.3,3164.7 ; v1(4960,3170) 4960,3025.95 U1.20@4961.42,3024.53
  Mid-Layer 1 w10: v1@4954.7,3175.3 ccw(c4941.89,3188.11) 4960,3188.11 ccw(c4978.11,3188.11) v1@4965.3,3175.3 ; v1(4960,3170) 4960,3190 5015,3245 5975,3245 v1(5975,3240) ; 5944.82,3245 cw(c5944.82,3209.82) v1@5969.7,3234.7
  Bottom Layer w10: R20.1@5967.93,3295.93 cw(c5950.86,3278.86) 5975,3278.86 cw(c5999.14,3278.86) R20.1@5982.07,3295.93 ; v1@5969.7,3245.3 ccw(c5956.89,3258.11) 5975,3258.11 ccw(c5993.11,3258.11) v1@5980.3,3245.3 ; v1(5975,3240) R20.1@5975,3303
BEEP: R6.2 U1.59 | length 926.1
  Top Layer w10: v1@4975,3547.5 cw(c4975,3517.32) 4996.34,3538.66 ; v1(4975,3555) 4975,3560 5000.79,3534.21 U1.59@5000.79,3465.47
  Mid-Layer 2 w10: v1@4439.7,3545.3 ccw(c4426.89,3558.11) 4445,3558.11 ccw(c4463.11,3558.11) v1@4450.3,3545.3 ; v1(4445,3540) 4445,3595 4475,3625 4905,3625 v1(4975,3555) ; v1@4967.5,3555 ccw(c4949.39,3555) 4962.2,3567.8 ccw(c4975,3580.61) v1@4975,3562.5
  Bottom Layer w10: R6.2@4438.06,3575.43 cw(c4420.99,3558.36) 4445.13,3558.36 cw(c4469.27,3558.36) R6.2@4452.2,3575.43 ; v1@4439.7,3545.3 ccw(c4426.58,3558.42) 4445.13,3558.42 ; v1(4445,3540) 4445.13,3540.13 R6.2@4445.13,3582.5 ; 4445.13,3557.8 ccw(c4462.8,3557.8) v1@4450.3,3545.3
CAN_RX1: U1.61 U3.4 | length 2039.7
  Top Layer w10: v1@4900,3575 4961.42,3513.58 U1.61@4961.42,3465.47 ; v1@4907.5,3580 ccw(c4937.68,3580) 4916.34,3558.66
  Mid-Layer 1 w10: v1(3940,4440) 3970,4470 4540,4470 4705,4305 4705,3775 v1(4900,3580) ; v1@3940,4447.5 ccw(c3940,4465.61) 3952.8,4452.8 ccw(c3965.61,4440) v1@3947.5,4440 ; v1@4892.5,3580 ccw(c4874.39,3580) 4887.2,3592.8 ccw(c4900,3605.61) v1@4900,3587.5
  Bottom Layer w10: v1(3940,4440) 3950,4430 U3.4@4080,4430 ; U3.4@4054.7,4424.7 ccw(c4041.89,4411.89) 4041.89,4430 ccw(c4041.89,4448.11) U3.4@4054.7,4435.3
CAN_RX2: U1.57 U4.4 | length 1344.6
  Top Layer w10: U1.57@5040.16,3465.47 5040.16,3555.16 v1(5080,3595) ; v1@5072.5,3595 cw(c5054.39,3595) 5067.2,3582.2 cw(c5080,3569.39) v1@5080,3587.5
  Mid-Layer 1 w10: v1@5074.7,3600.3 ccw(c5061.89,3613.11) 5080,3613.11 ccw(c5098.11,3613.11) v1@5085.3,3600.3 ; v1(5080,3595) 5080,3685 5370,3975 v1(5370,4490) ; v1@5364.7,4484.7 cw(c5351.89,4471.89) 5370,4471.89 cw(c5388.11,4471.89) v1@5375.3,4484.7
  Bottom Layer w10: v1@5364.7,4484.7 cw(c5351.89,4471.89) 5370,4471.89 cw(c5388.11,4471.89) v1@5375.3,4484.7 ; v1@5370,4480.18 ccw(c5405.18,4480.18) U4.4@5380.3,4455.3 ; v1(5370,4490) 5370,4455 U4.4@5375,4450
CAN_TX1: U1.62 U3.1 | length 1797
  Top Layer w10: v1(4940,3360) 4941.73,3361.73 U1.62@4941.73,3465.47
  Mid-Layer 1 w10: v1@4075,4207.5 cw(c4075,4189.39) 4087.8,4202.2 cw(c4100.61,4215) v1@4082.5,4215 ; v1(4075,4215) 4095,4195 4650,4195 4665,4180 4665,3635 v1(4940,3360) ; v1@4932.5,3360 ccw(c4914.39,3360) 4927.2,3372.8 ccw(c4940,3385.61) v1@4940,3367.5
  Bottom Layer w10: v1@4069.7,4220.3 ccw(c4056.89,4233.11) 4075,4233.11 ccw(c4093.11,4233.11) v1@4080.3,4220.3 ; v1(4075,4215) 4075,4275 U3.1@4080,4280
CAN_TX2: U1.58 U4.1 | length 1260.2
  Top Layer w10: v1@4985,3592.5 cw(c4985,3562.32) 5006.34,3583.66 ; v1(4985,3600) 4990,3600 5020.47,3569.53 U1.58@5020.47,3465.47
  Mid-Layer 1 w10: v1@4977.5,3600 ccw(c4959.39,3600) 4972.2,3612.8 ccw(c4985,3625.61) v1@4985,3607.5 ; v1(4985,3600) 4910,3675 4910,3890 5295,4275 v1(5295,4300) ; v1@5289.7,4294.7 cw(c5276.89,4281.89) 5295,4281.89 cw(c5313.11,4281.89) v1@5300.3,4294.7
  Bottom Layer w10: v1(5295,4300) U4.1@5375,4300 ; v1@5300.3,4294.7 cw(c5313.11,4281.89) 5313.11,4300 cw(c5313.11,4318.11) v1@5300.3,4305.3 ; U4.1@5349.7,4294.7 ccw(c5336.89,4281.89) 5336.89,4300 ccw(c5336.89,4318.11) U4.1@5349.7,4305.3
CS_FLASH: U1.41 U2.1 | length 1501.7
  Top Layer w10: U2.1@5178.27,3975 v1(5255,3975) ; U2.1@5200.1,3970.88 cw(c5210.05,3960.93) 5210.05,3975 cw(c5210.05,3989.07) U2.1@5200.1,3979.12 ; v1@5249.7,3969.7 ccw(c5236.89,3956.89) 5236.89,3975 ccw(c5236.89,3993.11) v1@5249.7,3980.3 ; U1.41@5270.47,3254.84 5535.16,3254.84 v1(5595,3195) ; v1@5587.5,3195 ccw(c5569.39,3195) 5582.2,3207.8 ccw(c5595,3220.61) v1@5595,3202.5
  Mid-Layer 2 w10: v1@5252.5,3975 ccw(c5270.61,3975) 5257.8,3962.2 ; v1(5255,3975) 5255,3965 5530,3690 5530,3460 5595,3395 v1(5595,3195) ; v1@5262.5,3975 ccw(c5304.75,3975) 5274.87,3945.13 ; v1@5589.7,3200.3 ccw(c5576.89,3213.11) 5595,3213.11 ccw(c5613.11,3213.11) v1@5600.3,3200.3
CS_IMU: ICM1.5 U1.21 | length 997.5
  Top Layer w10: v1@4950,3257.5 cw(c4950,3239.39) 4962.8,3252.2 cw(c4975.61,3265) v1@4957.5,3265 ; v1(4950,3265) 5000,3215 5000,3195 5000,3155 4981.1,3136.1 U1.21@4981.1,3024.53 ; ICM1.5@4978.74,3860 4978.74,3836.26 4990,3825
  Mid-Layer 1 w10: v1(4950,3265) 5030,3345 5030,3800 v1(5005,3825) ; v1@4950,3272.5 ccw(c4950,3290.61) 4962.8,3277.8 ccw(c4975.61,3265) v1@4957.5,3265 ; v1@5005,3817.5 cw(c5005,3799.39) 5017.8,3812.2 cw(c5030.61,3825) v1@5012.5,3825
DM: U1.44 USB_L1.4 | length 1025.5
  Top Layer w10: U1.44@5270.47,3313.9 5643.9,3313.9 5845,3515 USB_L1.4@5845,3856.89 ; USB_L1.4@5840.18,3852.07 cw(c5828.56,3840.45) 5845,3840.45 cw(c5861.44,3840.45) USB_L1.4@5849.82,3852.07
DP: U1.45 USB_L1.3 | length 1064.8
  Top Layer w10: U1.45@5270.47,3333.58 5633.58,3333.58 5785,3485 5785,3880 5801.26,3896.26 USB_L1.3@5845,3896.26 ; USB_L1.3@5821.48,3891.44 ccw(c5809.86,3879.82) 5809.86,3896.26 ccw(c5809.86,3912.7) USB_L1.3@5821.48,3901.08
GND: BAT1.1 C1.2 C2.1 C3.2 C4.2 C5.1 C6.1 C7.1 C8.2 C9.2 C10.2 C11.1 C12.2 C13.2 C14.2 C15.2 C16.2 C17.2 C18.2 C19.1 C20.1 C21.1 C24.1 C25.1 C27.2 CAN1.2 CAN2.2 CAN3.2 CAN4.2 D2.3 D3.3 DBUS1.3 DCDC1.3 DCDC1.4 DS1.2 DS2.2 ICM1.8 ICM1.9 ICM1.10 ICM1.11 ICM1.12 ICM1.13 ICM1.15 IDLE1.2 P2.3 P3.1 P10.3 PIO.1 PIO.14 Q1.1 Q2.1 R1.1 R4.1 R7.1 R19.1 R22.1 RADIO1.2 RST.2 SBUS.3 SWD1.1 U1.12 U1.18 U1.63 U2.4 U3.2 U3.8 U4.2 U4.8 U5.5 USB_L1.1 V1.2 | length 504.6
  Top Layer w10: U1.12@4829.53,3176.1 4900,3176.1 4922.05,3154.06 4922.05,3070 ; 4900,3375 4922.05,3397.05 U1.63@4922.05,3465.47 4922.05,3407.05 ; 4922.05,2952.05 U1.18@4922.05,3024.53 4922.05,3070 ; 4922.05,3112.95 4922.05,3070
  other v1: 5040,2595 5155,2595 4065,2850 4765,2885 4870,2955 3635,2970 5480,2990 4030,3020 4070,3215 4070,3310 5795,3325 3650,3360 4255,3415 5285,3530 5460,3545 4810,3555 3805,3595 5340,3635 5460,3645 4765,3665 4820,3715 5720,3780 3625,3790 4760,3810 5080,3980 5775,3980 4820,4015 5045,4110 5270,4110 5590,4115 5540,4145 5770,4155 5050,4215 5540,4225 4870,4310 5790,4360 4870,4415 5790,4430
GROUND1: PIO.13 U1.8 | length 1244.8
  Top Layer w10: v1@4733.23,3263.23 ccw(c4753.49,3283.49) 4753.49,3254.84 ; v1(4735,3265) 4745.16,3254.84 U1.8@4829.53,3254.84 ; v1@4740.3,3270.3 ccw(c4777.63,3307.63) 4777.63,3254.84
  Mid-Layer 2 w10: PIO.13@3960,3460 4625,3460 4735,3350 4735,3305 v1(4735,3265) ; PIO.13@3970.27,3449.73 cw(c3995.07,3424.93) 3995.07,3460 cw(c3995.07,3495.07) PIO.13@3970.27,3470.27 ; PIO.13@3977.34,3442.66 cw(c4019.21,3400.79) 4019.21,3460 cw(c4019.21,3519.21) PIO.13@3977.34,3477.34 ; v1@4729.7,3270.3 ccw(c4716.89,3283.11) 4735,3283.11 ccw(c4753.11,3283.11) v1@4740.3,3270.3
GROUND2: PIO.11 U1.9 | length 1110.3
  Top Layer w10: v1(4735,3220) 4750.16,3235.16 U1.9@4829.53,3235.16
  Mid-Layer 2 w10: PIO.11@3960,3360 4455,3360 4595,3220 v1(4735,3220) ; PIO.11@3970.27,3349.73 cw(c3995.07,3324.93) 3995.07,3360 cw(c3995.07,3395.07) PIO.11@3970.27,3370.27 ; PIO.11@3977.34,3342.66 cw(c4019.21,3300.79) 4019.21,3360 cw(c4019.21,3419.21) PIO.11@3977.34,3377.34 ; v1@4729.7,3214.7 ccw(c4716.89,3201.89) 4716.89,3220 ccw(c4716.89,3238.11) v1@4729.7,3225.3
GROUND3: U1.10
GROUND4: U1.11
GROUND5: U1.24
GROUND6: U1.25
INT: ICM1.6
LED1: R8.1 U1.56 | length 3558.9
  Top Layer w10: v1(3770,4270) 3780,4270 3802.03,4247.97 R8.1@3802.03,4209.94 ; R8.1@3794.96,4217.01 ccw(c3777.89,4234.08) 3802.03,4234.08 ccw(c3826.17,4234.08) R8.1@3809.1,4217.01 ; v1(5045,3315) 5059.84,3329.84 U1.56@5059.84,3465.47
  Mid-Layer 1 w10: v1@3764.7,4275.3 ccw(c3751.89,4288.11) 3770,4288.11 ccw(c3788.11,4288.11) v1@3775.3,4275.3 ; v1(3770,4270) 3770,4405 3915,4550 5415,4550 5415,3840 5080,3505 5080,3350 v1(5045,3315) ; v1@5045,3322.5 ccw(c5045,3340.61) 5057.8,3327.8 ccw(c5070.61,3315) v1@5052.5,3315
LED2: R9.1 U1.55 | length 4779.4
  Top Layer w10: v1@3799.7,4030.3 ccw(c3786.89,4043.11) 3805,4043.11 ccw(c3823.11,4043.11) v1@3810.3,4030.3 ; R9.1@3802.03,4089.94 3805,4086.97 v1(3805,4025) ; v1(5035,3205) 5079.53,3249.53 U1.55@5079.53,3465.47 ; v1@5035,3212.5 ccw(c5035,3230.61) 5047.8,3217.8 ccw(c5060.61,3205) v1@5042.5,3205
  Mid-Layer 2 w10: v1@3799.7,4030.3 ccw(c3786.89,4043.11) 3805,4043.11 ccw(c3823.11,4043.11) v1@3810.3,4030.3 ; v1(3805,4025) 3805,4100 3855,4150 5455,4150 5940,3665 5940,2935 5865,2860 5510,2860 5275,3095 5275,3175 5205,3245 5075,3245 v1(5035,3205) ; v1@5035,3212.5 ccw(c5035,3230.61) 5047.8,3217.8 ccw(c5060.61,3205) v1@5042.5,3205
NetBEEP?_2: BEEP?.2 Q2.3 | length 301.9
  Bottom Layer w10: v1@4379.7,3829.7 cw(c4366.89,3816.89) 4385,3816.89 cw(c4403.11,3816.89) v1@4390.3,3829.7 ; v1(4385,3835) 4385,3750 4395,3740 4486.26,3740 Q2.3@4545,3681.26
NetBOOT1_2: BOOT1.2 R4.2 U1.60 | length 2275.5
  Top Layer w10: BOOT1.2@3724,4351 3728,4355 v1(3820,4355) ; v1@3814.7,4349.7 ccw(c3801.89,4336.89) 3801.89,4355 ccw(c3801.89,4373.11) v1@3814.7,4360.3 ; v1@4974.7,3365.3 ccw(c4959.23,3380.77) 4981.1,3380.77 ; v1(4980,3360) 4981.1,3361.1 U1.60@4981.1,3465.47 ; 4981.1,3375.45 ccw(c4995.45,3375.45) v1@4985.3,3365.3
  Bottom Layer w10: v1@3814.7,4349.7 cw(c3801.89,4336.89) 3820,4336.89 cw(c3838.11,4336.89) v1@3825.3,4349.7 ; v1(3820,4355) 3820,4275 3945,4150 4615,4150 4690,4075 4690,3950 5020,3620 5020,3367.44 R4.2@5012.5,3359.94 4980.06,3359.94 v1(4980,3360) ; v1@4985.3,3354.7 cw(c4997.95,3342.05) R4.2@4997.95,3359.94 ; v1@4985.3,3365.3 ccw(c4998.26,3378.26) R4.2@4998.26,3359.94 ; R4.2@5005.43,3352.86 ccw(c4988.36,3335.79) 4988.36,3359.94 ccw(c4988.36,3384.08) R4.2@5005.43,3367.01
NetC3_1: C3.1 U1.31 | length 291.8
  Top Layer w10: C3.1@5110,2762 5112,2762 5177.95,2827.95 5177.95,2910 U1.31@5177.95,3024.53
NetC4_1: C4.1 U1.47 | length 175.4
  Top Layer w10: U1.47@5270.47,3372.95 5352.95,3372.95 5365,3385 C4.1@5403,3385 ; C4.1@5395.93,3377.93 ccw(c5378.86,3360.86) 5378.86,3385 ccw(c5378.86,3409.14) C4.1@5395.93,3392.07